# Altium PCB PCB1.PcbDoc
Units mm, origin at the board's own origin, x right, y up, seen from the top; angles counter-clockwise.
Board outline 16 x 35 mm, 2 copper layers (Top Layer, Bottom Layer); 36 components, 31 nets, 126 pads, 45 vias.
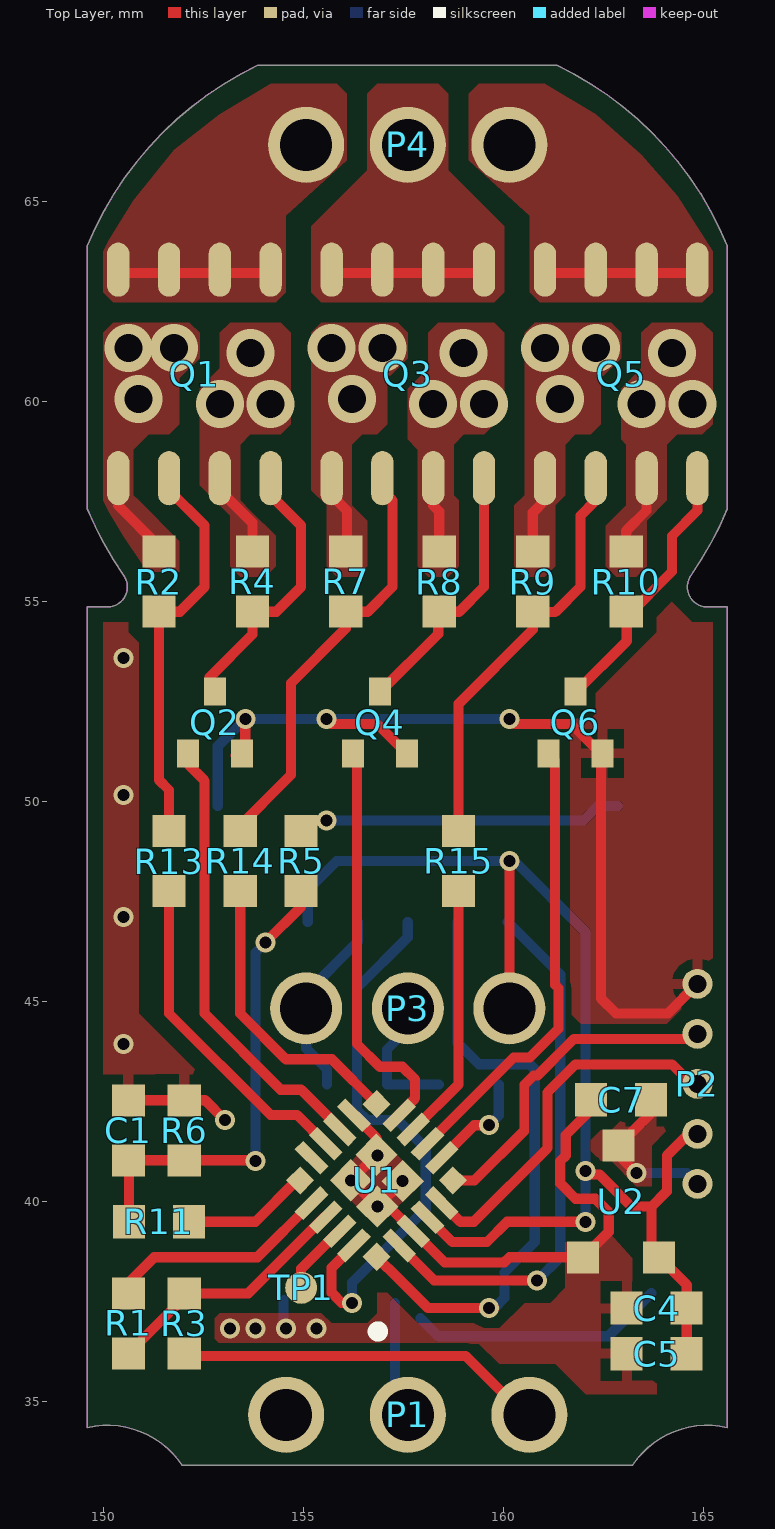
[diagram p0: Top Layer view]
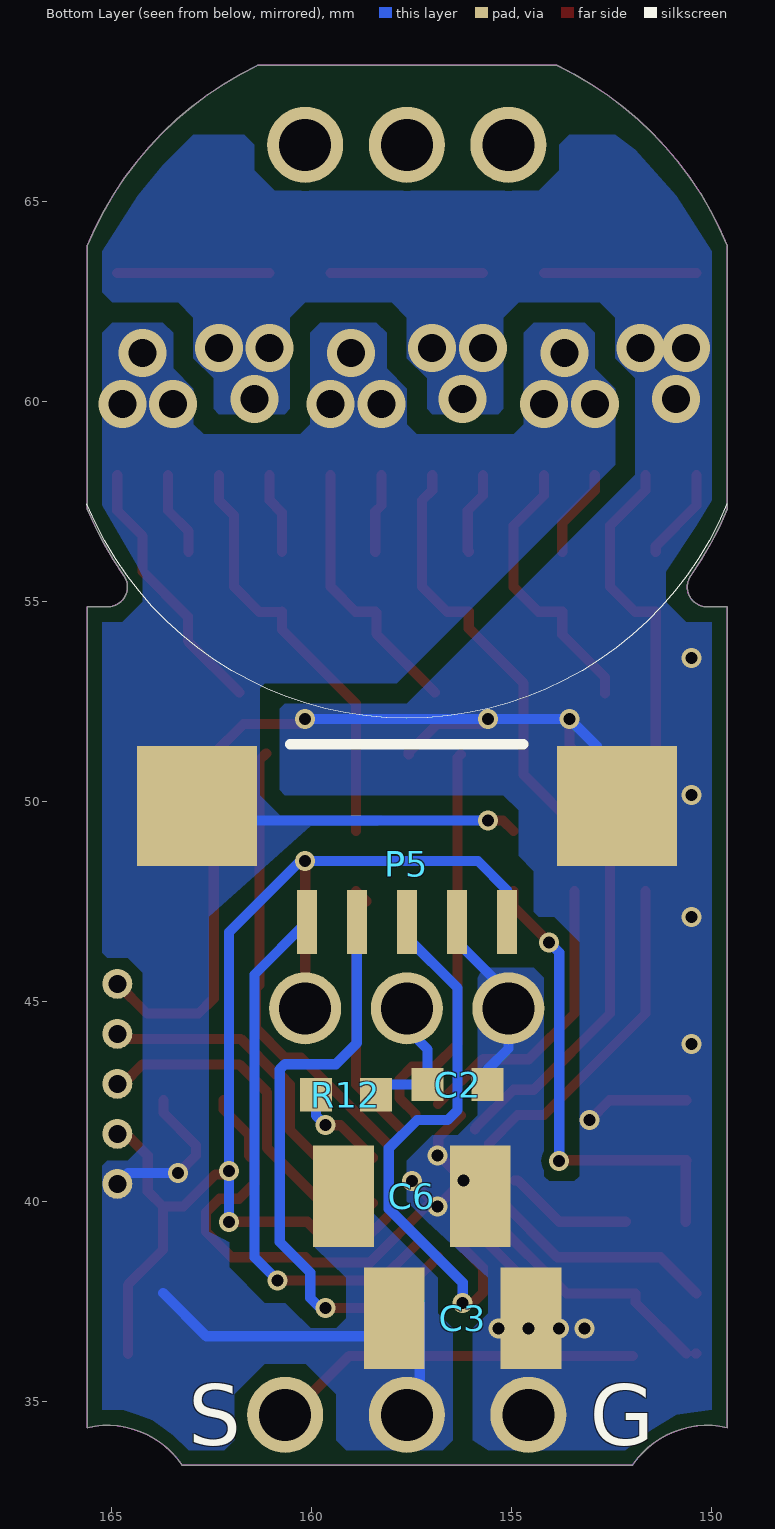
[diagram p1: Bottom Layer view, seen from below]

## Layer stack, top to bottom
Top Solder: solder mask 0.0102, Solder Resist, Dk 3.5
Top Layer: signal copper 0.0356
Dielectric 1: dielectric 0.32, FR-4, Dk 4.8
Bottom Layer: signal copper 0.0356
Bottom Solder: solder mask 0.0102, Solder Resist, Dk 3.5

## Board outline
149.595,34.352 cw(c150.095,32.158) 151.965,33.408 163.224,33.408 cw(c165.095,32.158) 165.595,34.352 165.595,54.866 165.095,54.866 cw(c165.095,55.366) 164.685,55.653 ccw(c157.595,60.608) 165.595,57.318 165.595,63.898 ccw(c157.595,60.608) 161.334,68.408 153.855,68.408 ccw(c157.595,60.608) 149.595,63.898 149.595,57.318 ccw(c157.595,60.608) 150.504,55.653 cw(c150.095,55.366) 150.095,54.866 149.595,54.866

## Design rules (kind name [scope] priority, off if disabled: settings)
Clearance [All] p1: gap=0.2
ComponentClearance [All] p1: gap=0 collisioncheckmode=3 verticalgap=0 showdistances=TRUE
PolygonConnect PolygonConnect_2 [HasFootprint('ZHB_DTC114WUA')] p1: connectstyle=Relief reliefconductorwidth=0.254 reliefentries=4 polygonreliefangle="90 Angle" airgapwidth=0.254
PolygonConnect PolygonConnect_1 [HasFootprint('ZHB_0603') And OnLayer('Top Layer')] p2: connectstyle=Relief reliefconductorwidth=0.254 reliefentries=4 polygonreliefangle="90 Angle" airgapwidth=0.254
PolygonConnect [All] p3: connectstyle=Direct reliefconductorwidth=0.254 reliefentries=4 polygonreliefangle="90 Angle" airgapwidth=0.254
RoutingVias [All] p1: holewidth=0.5 width=0.9 viastyle="Through Hole" minholewidth=0.3 minwidth=0.5 maxholewidth=0.5 maxwidth=0.9
SolderMaskExpansion [All] p1: expansion=0.102
Width [All] p1: maxlimit=0.254 minlimit=0.254 preferedwidth=0.254
29 further rules are at their usual default settings.

## Classes and differential pairs
component class BLDC_SERVO: C1 C2 C3 C4 C5 P1 P2 P3 P4 P5 Q1 Q2 Q3 Q4 Q5 Q6 R1 R2 R3 R4 R5 R6 R7 R8 R9 R10 TP1 U1 U2

## Components (designator, comment, footprint, x,y, rotation, side; value= is the part's Value field where it differs from the comment)
C1 "100nF" ZHB_0603 150.622,41.783 r270 top
C2 "100nF" ZHB_0603 156.337,42.926 r0 bottom
C3 "47uF/1210" ZHB_1210 156.21,37.084 r0 bottom
C4 "100nF" ZHB_0603 163.83,37.338 r0 top
C5 "10uF/0805" ZHB_0603 163.83,36.195 r0 top
C6 "47uF/1210" ZHB_1210 157.48,40.132 r0 bottom (schematic designator C3)
C7 "100nF" ZHB_0603 162.941,42.545 r180 top (schematic designator C4)
P1 "SERVO_LINE" Power_com 160.647,34.671 r180 top
P2 "PROG" PRO_5 164.846,40.446 r90 top
P3 "POT" 'CON_3 160.147,44.831 r180 top
P4 "MOTOR" Motor_Con3 155.067,66.421 r0 top locked
P5 "HALL" 125T 160.107,46.99 r180 bottom
Q1 "NCE4606" NCE4606 150.368,58.166 r90 top locked
Q2 "DTC114WUA/SOT323" ZHB_DTC114WUA 152.781,51.181 r0 top
Q3 "NCE4606" NCE4606 155.702,58.166 r90 top locked
Q4 "DTC114WUA/SOT323" ZHB_DTC114WUA 156.909,51.181 r0 top
Q5 "NCE4606" NCE4606 161.036,58.166 r90 top locked
Q6 "DTC114WUA/SOT323" ZHB_DTC114WUA 161.798,51.181 r0 top
R1 "3K3" ZHB_0603 150.622,36.957 r90 top
R2 "3K3" ZHB_0603 151.384,55.499 r270 top
R3 "3K3" ZHB_0603 152.019,36.957 r90 top
R4 "3K3" ZHB_0603 153.721,55.499 r270 top
R5 "10K" ZHB_0603 154.94,48.514 r270 top
R6 "3K3" ZHB_0603 152.019,41.783 r90 top
R7 "3K3" ZHB_0603 156.058,55.499 r270 top
R8 "3K3" ZHB_0603 158.394,55.499 r270 top
R9 "3K3" ZHB_0603 160.731,55.499 r270 top
R10 "3K3" ZHB_0603 163.068,55.499 r270 top
R11 "100" ZHB_0603 151.384,39.497 r180 top (schematic designator R6)
R12 "100" ZHB_0603 159.131,42.672 r180 bottom (schematic designator R6)
R13 "100" ZHB_0603 151.638,48.514 r270 top (schematic designator R6)
R14 "100" ZHB_0603 153.416,48.514 r270 top (schematic designator R6)
R15 "100" ZHB_0603 158.877,48.514 r270 top (schematic designator R6)
TP1 "PAD" Check_point 154.94,37.846 r90 top
U1 "EFM8BB10F8G" EFM8B10F8G 156.826,40.531 r135 top
U2 "ME6209A33/SOT23" ZHB_ME6208 162.941,38.608 r0 top

## Footprints (in the part's own frame and the unit in brackets; to place one, negate y for a bottom-side part, rotate by r counter-clockwise, add the part's x,y. Pads: shape width x height; smd on the part's side, far side on the other; paste and mask are expansions set on the pad)
125T [mm]
  rect 3x3 smd: 0(-2.75,2.9) 0(7.75,2.9)
  rect 0.5x1.6 smd: 1(0,0) 2(1.25,0) 3(2.5,0) 4(3.75,0) 5(5,0)
'CON_3 [mm]
  round 1.8 hole 1.3: 1(0,0) 2(2.54,0) 3(5.08,0)
Check_point [mm]
  round 0.8 smd: 0(0,0)
EFM8B10F8G [mm]
  rect 0.75x0.75 smd: 0(-0.475,-0.45) 0(-0.475,0.45) 0(0.455,0.45) 0(0.455,-0.45)
  rect 0.5x0.5 smd: 1(-1.35,1.35) 6(-1.35,-1.35) 11(1.35,-1.35) 16(1.35,1.35)
  rect 0.9x0.3 smd: 2(-1.55,0.75) 3(-1.55,0.25) 4(-1.55,-0.25) 5(-1.55,-0.75) 12(1.55,-0.75) 13(1.55,-0.25) 14(1.55,0.25) 15(1.55,0.75)
  rect 0.3x0.9 smd: 7(-0.75,-1.55) 8(-0.25,-1.55) 9(0.25,-1.55) 10(0.75,-1.55) 17(0.75,1.55) 18(0.25,1.55) 19(-0.25,1.55) 20(-0.75,1.55)
  silkscreen extent -2.82,2.52 -2.57,2.77
Motor_Con3 [mm]
  round 1.9 hole 1.3: 1(0,0) 2(2.54,0) 3(5.08,0)
NCE4606 [mm]
  oval 1.354x0.559 smd: 1(-0.08,0) 2(-0.08,-1.27) 3(-0.08,-2.54) 4(-0.08,-3.81) 5(5.134,-3.81) 6(5.134,-2.54) 7(5.134,-1.27) 8(5.134,0)
Power_com [mm]
  round 1.9 hole 1.3: 1(0,0) 2(3.04,0) 3(6.08,0)
PRO_5 [mm]
  round 0.75 hole 0.45: 1(0,0) 2(1.25,0) 3(2.5,0) 4(3.75,0) 5(5,0)
ZHB_0603 [mm]
  rect 0.8x0.83 smd: 1(-0.75,0) 2(0.75,0)
ZHB_1210 [mm]
  rect 1.52x2.54 smd: 1(-1.71,0) 2(1.71,0)
ZHB_DTC114WUA [mm]
  rect 0.55x0.7 smd: 1(-0.675,0.025) 2(0.675,0.025) 3(0,1.575)
ZHB_ME6208 [mm]
  rect 0.8x0.8 smd: 1(-0.95,0) 2(0.95,0) 3(-0.061,2.8)

## Part data
C1 C2 C3 C4 C5 C6 C7: library part CAP(SMD)
P1 P3 P4: library part HEAD_3X1_V
P2 P5: library part HEAD_5X1_V
Q1 Q3 Q5: library part FDS8858DS
Q2 Q4 Q6: library part DTC114WUA
R1 R2 R3 R4 R5 R6 R7 R8 R9 R10 R11 R12 R13 R14 R15: library part RES(SMD)
TP1: library part TP
U2: library part ME6209A33

## Via types
v1: diameter 0.5, hole 0.3, Top Layer to Bottom Layer, tented both sides, 27 vias
v2: diameter 1.2, hole 0.7, Top Layer to Bottom Layer, tented both sides, 18 vias

## Nets (pads, with @x,y where several pads share a name; then routed paths per layer and width w, separated by ;. In a path a pad name is that pad's centre, name@x,y a point inside that pad or via, vN(x,y) a via of type N, cw(c..) or ccw(c..) an arc to the next point about the centre after c; other vN are vias at no path point)
+3V3: C4.2 C5.2 P2.2 P3.1 P5.5 U1.4 U2.2 | length 32.6
  Top Layer w0.254: U1.4 158.721,38.989 159.586,38.989 160.094,39.497 v1(162.052,39.497) ; P3.1 v1(160.147,48.514) ; v1(162.052,40.767) 162.138,40.681 162.392,40.681 163.195,39.878 163.703,39.878 ; C5.2 C4.2 164.58,37.919 U2.2 163.703,38.796 163.703,39.878 ; P2.2 164.632,41.696 164.084,41.148 164.084,40.259 163.703,39.878
  Bottom Layer w0.254: P5.5 155.107,47.792 155.829,48.514 v1(160.147,48.514) 160.274,48.514 162.052,46.736 v1(162.052,40.767) v1(162.052,39.497)
+VBAT: C3.2 C6.2 C7.1 P1.2 P2.1 P5.0@162.857,49.89 Q1.3 Q3.3 Q5.3 R4.1 R5.1 R8.1 R10.1 U2.3 | length 28
  Top Layer w0.254: Q1.3@152.908,58.166 Q1.3 152.908,57.785 153.721,56.972 R4.1 ; R5.1 155.206,49.53 v1(155.575,49.53) ; Q3.3@158.242,58.166 Q3.3 158.242,57.404 158.394,57.252 R8.1 ; R10.1 163.068,56.769 163.576,57.277 Q5.3 Q5.3@163.576,58.166 ; v1(163.322,40.712) 162.88,41.154 U2.3 163.691,42.219 C7.1
  Bottom Layer w0.254: v1(155.575,49.53) 161.997,49.53 162.357,49.89 P5.0@162.857,49.89 ; C3.2@157.285,37.465 157.285,34.866 P1.2@157.607,34.544 ; C3.2 158.369,36.635 162.619,36.635 163.703,37.719 ; v1(163.322,40.712) 164.58,40.712 P2.1
  other v2: 152.908,59.944 154.178,59.944 158.242,59.944 159.512,59.944 163.449,59.944 164.719,59.944 153.67,61.214 159.004,61.214 164.211,61.214
AH: Q2.1 U1.13 | length 11.3
  Top Layer w0.254: Q2.1 152.106,50.941 152.527,50.52 152.527,44.704 154.432,42.799 154.94,42.799 155.907,41.832 U1.13
AL: Q1.2 R2.2 R13.1 | length 10.2
  Top Layer w0.254: R13.1 151.638,50.292 151.384,50.546 R2.2 151.904,54.749 152.527,55.372 152.527,56.896 151.638,57.785 Q1.2 Q1.2@151.638,58.166
BH: Q4.1 U1.10 | length 10.2
  Top Layer w0.254: Q4.1@156.259,51.181 156.337,51.103 156.337,43.942 156.909,43.37 157.472,43.37 157.789,43.053 157.789,42.587 157.392,42.19 U1.10
BL: Q3.2 R7.2 R14.1 | length 11
  Top Layer w0.254: R14.1@153.289,49.276 154.686,50.673 154.686,52.959 156.058,54.331 R7.2 156.579,54.749 156.591,54.737 157.226,55.372 157.226,57.531 156.972,57.785 Q3.2 Q3.2@156.972,58.166
CH: Q6.1 U1.8 | length 11.5
  Top Layer w0.254: U1.8 160.253,43.604 160.655,43.604 161.374,44.323 161.374,45.339 161.29,45.423 161.29,51.039 Q6.1
CL: Q5.2 R9.2 R15.1 | length 10.7
  Top Layer w0.254: R15.1 158.877,52.451 160.731,54.305 R9.2 160.743,54.737 161.29,54.737 161.925,55.372 161.925,57.15 162.306,57.531 Q5.2 Q5.2@162.306,58.166
GND: C1.1 C2.1 C3.1 C4.1 C5.1 C6.1 C7.2 P1.3 P2.5 P3.3 P5.0@152.357,49.89 P5.4 Q1.1 Q2.2 Q3.1 Q4.2 Q5.1 Q6.2 R2.1 R6.2 R7.1 R9.1 U1.0 U1.3 U1.12 U2.1 | length 53.5
  Top Layer w0.254: Q1.1@150.368,58.166 Q1.1 150.368,57.404 151.384,56.388 R2.1 ; C1.1 R6.2 152.539,42.533 v1(153.035,42.037) ; Q2.2@153.304,51.155 153.543,51.394 v1(153.543,52.07) ; v1(155.575,52.07) 155.702,51.943 156.845,51.943 157.559,51.229 Q4.2@157.559,51.181 ; Q3.1@155.702,58.166 Q3.1 155.702,57.658 156.083,57.277 156.083,56.274 R7.1 ; U1.12 156.822,41.595 156.822,41.171 v1(156.186,40.534) U1.0@156.844,39.877 ; v1(157.48,40.513) U1.0@156.844,39.877 ; v1(160.147,52.07) 160.274,51.943 161.686,51.943 Q6.2@162.448,51.181 ; R9.1 160.731,57.226 161.036,57.531 Q5.1 Q5.1@161.036,58.166 ; C7.2 162.191,42.303 161.553,41.665 161.553,41.15 161.417,41.014 161.417,40.458 161.807,40.068 161.813,40.074 162.291,40.074 162.629,39.736 162.629,39.258 162.623,39.252 162.629,39.246 U2.1 160.147,38.608 160.02,38.481 158.522,38.481 157.126,39.877 U1.0@156.844,39.877 ; Q6.2@162.433,51.181 162.433,45.085 162.814,44.704 164.104,44.704 P2.5
  Bottom Layer w0.254: P5.0@152.857,49.89 152.857,51.384 v1(153.543,52.07) v1(155.575,52.07) v1(160.147,52.07) ; C3.1 C3.1@154.5,37.533 ; C2.1 155.587,43.307 155.067,43.827 P3.3 155.067,45.212 156.357,46.502 P5.4
  other v1: 153.162,36.83 153.797,36.83 154.559,36.83 155.321,36.83 156.845,39.878 156.845,41.148 150.495,43.942 150.495,47.117 150.495,50.165 150.495,53.594
  other v2: 150.876,60.071 156.21,60.071 161.417,60.071 150.622,61.341 151.765,61.341 155.702,61.341 156.972,61.341 161.036,61.341 162.306,61.341
HA: P5.1 U1.2 | length 13.6
  Top Layer w0.254: U1.2 158.269,38.027 v1(160.836,38.027)
  Bottom Layer w0.254: P5.1 161.417,45.68 161.417,38.608 v1(160.836,38.027)
HB: P5.2 U1.1 | length 15.2
  Top Layer w0.254: U1.1 157.109,38.339 157.114,38.339 158.115,37.338 v1(159.639,37.338) v1@159.766,37.338
  Bottom Layer w0.254: P5.2 158.857,43.962 159.385,43.434 160.655,43.434 160.782,43.307 160.782,38.989 160.02,38.227 160.02,37.592 159.766,37.338 v1(159.639,37.338)
HC: P5.3 U1.20 | length 14
  Top Layer w0.254: v1(156.21,37.465) 155.956,37.465 155.702,37.719 155.702,38.346 U1.20
  Bottom Layer w0.254: v1(156.21,37.465) 156.21,37.973 158.057,39.82 158.057,41.333 157.353,42.037 156.591,42.037 156.337,42.291 156.337,45.339 157.607,46.609 P5.3
NetP1_1: P1.1 R3.1 | length 9.4
  Top Layer w0.254: R3.1@151.956,36.144 159.048,36.144 P1.1@160.647,34.544
NetP2_3: P2.3 U1.5 | length 9.2
  Top Layer w0.254: U1.5 158.92,39.497 159.258,39.497 161.1,41.338 161.1,42.731 161.8,43.432 164.213,43.432 164.699,42.946 P2.3
NetP2_4: P2.4 U1.6 | length 8.3
  Top Layer w0.254: U1.6 159.276,40.531 160.528,41.783 160.528,42.928 160.75,43.15 160.843,43.15 161.762,44.069 164.719,44.069 P2.4
NetQ1_4: Q1.4 Q2.3 R4.2 | length 7.1
  Top Layer w0.254: Q2.3@152.654,52.705 152.654,53.112 153.721,54.179 R4.2 154.317,54.749 154.94,55.372 154.94,56.896 154.178,57.658 Q1.4 Q1.4@154.178,58.166
NetQ3_4: Q3.4 Q4.3 R8.2 | length 6.8
  Top Layer w0.254: Q4.3@156.909,52.731 158.369,54.191 158.369,54.724 R8.2 158.889,54.749 159.512,55.372 Q3.4 Q3.4@159.512,58.166
NetQ5_4: Q5.4 Q6.3 R10.2 | length 6.7
  Top Layer w0.254: Q6.3@161.798,52.731 163.08,54.013 163.08,54.622 164.211,55.753 164.211,56.642 164.846,57.277 Q5.4 Q5.4@164.846,58.166
NetR1_1: R1.1 R3.2 U1.18 | length 6.5
  Top Layer w0.254: R1.1@150.368,36.207 R1.1@150.392,36.207 ; R1.1 151.892,37.477 151.892,37.707 R3.2 153.616,37.707 155.521,39.611 U1.18
NetR1_2: R1.2 U1.17 | length 5.8
  Top Layer w0.254: R1.2@150.368,37.707 151.269,38.608 153.843,38.608 U1.17
NetR1_3: C1.2 R5.2 R6.1 R11.2 | length 11.9
  Top Layer w0.254: R11.2 150.634,41.021 C1.2 R6.1 153.785,41.033 v1(153.797,41.021) ; v1(154.051,46.482) 154.94,47.371 R5.2
  Bottom Layer w0.254: v1(153.797,41.021) 153.797,46.228 v1(154.051,46.482)
NetR1_4: C2.2 P3.2 R12.2 | length 3.4
  Bottom Layer w0.254: P3.2 157.607,44.323 157.087,43.803 C2.2 R12.2@158.381,42.926
NetR1_5: R13.2 U1.14 | length 8.3
  Top Layer w0.254: R13.2 151.638,44.704 154.178,42.164 154.839,42.164 U1.14
NetR1_6: R14.2 U1.11 | length 7.4
  Top Layer w0.254: R14.2 153.416,44.704 154.559,43.561 155.705,43.561 U1.11
NetR1_7: R15.2 U1.9 | length 6.8
  Top Layer w0.254: U1.9 158.877,42.935 R15.2 R15.2@158.623,47.51
NetTP1_1: TP1.0 U1.19 | length 1.9
  Top Layer w0.254: TP1.0 154.94,38.324 155.842,39.225 155.907,39.225 U1.19
PH_A: P4.1 Q1.5 Q1.6 Q1.7 Q1.8 | length 3.8
  Top Layer w0.254: Q1.8@150.368,63.22 Q1.5@154.178,63.22
PH_B: P4.2 Q3.5 Q3.6 Q3.7 Q3.8 | length 3.8
  Top Layer w0.254: Q3.8@155.702,63.22 Q3.5@159.512,63.22
PH_C: P4.3 Q5.5 Q5.6 Q5.7 Q5.8 | length 3.8
  Top Layer w0.254: Q5.8@161.036,63.22 Q5.5@164.846,63.22
VBAT: R11.1 U1.16 | length 3.2
  Top Layer w0.254: R11.1 153.797,39.497 154.831,40.531 U1.16
VPOT: R12.1 U1.7 | length 2.6
  Top Layer w0.254: U1.7 159.266,41.91 v1(159.639,41.91)
  Bottom Layer w0.254: v1(159.639,41.91) 159.881,42.152 R12.1 R12.1@159.881,42.926
pads on no net: U1.15

## Polygon pours and split planes (outlines as drawn)
GND on Top Layer "GND" (solid, pour order 38): 152.908,37.211 152.781,37.084 152.781,36.576 152.908,36.449 159.385,36.449 159.766,36.068 159.893,35.941 161.29,35.941 162.052,35.179 162.466,35.179 163.83,35.179 163.83,37.846 163.224,37.973 163.224,38.579 162.596,39.279 162.466,39.149 162.306,38.989 161.544,38.989 161.544,38.481 161.544,37.846 161.163,37.465 160.655,37.465 160.528,37.465 159.893,36.83 159.512,36.83 159.258,36.957 157.861,36.957 157.099,37.719 156.845,37.719 156.845,37.211 156.591,36.957 155.575,36.957 155.702,36.957 155.448,37.211 153.162,37.211
+VBAT on Top Layer "+VBAT" (solid, pour order 24): 163.449,61.722 163.449,60.96 163.449,60.833 162.941,60.325 162.941,59.182 162.941,59.055 163.068,58.928 163.068,57.531 163.068,57.404 162.56,56.896 162.56,55.88 162.814,55.626 163.322,55.626 163.576,55.88 163.576,56.896 163.576,57.023 164.084,57.531 164.084,58.928 164.338,59.182 164.973,59.182 165.227,59.436 165.227,61.722 164.973,61.976 163.703,61.976
+VBAT on Top Layer "+VBAT" (solid, pour order 22): 158.115,61.722 158.115,61.087 158.115,60.96 158.115,60.833 157.607,60.325 157.607,59.436 157.607,59.182 157.607,59.055 157.861,58.801 157.861,55.88 158.115,55.626 158.623,55.626 158.75,55.753 158.877,55.88 158.877,57.531 158.75,57.658 158.75,58.928 159.004,59.182 159.512,59.182 159.893,59.563 160.02,59.69 160.02,61.722 159.766,61.976 158.369,61.976
GND on Top Layer "GND" (solid, pour order 20): 160.782,61.976 160.528,61.722 160.528,57.658 160.274,57.404 160.274,55.88 160.528,55.626 161.036,55.626 161.29,55.88 161.29,57.404 161.544,57.658 161.544,58.928 161.798,59.182 162.052,59.182 162.179,59.182 162.433,59.436 162.433,60.579 162.941,61.087 162.941,61.722 162.687,61.976
GND on Top Layer "GND" (solid, pour order 18): 155.448,61.976 155.194,61.722 155.194,57.785 155.575,57.404 155.575,55.88 155.829,55.626 156.337,55.626 156.591,55.88 156.591,56.642 156.591,57.023 156.21,57.404 156.21,57.531 156.21,58.928 156.337,59.055 156.464,59.182 156.845,59.182 156.972,59.309 157.099,59.436 157.099,60.579 157.226,60.706 157.607,61.087 157.607,61.722 157.353,61.976
+VBAT on Top Layer "+VBAT" (solid, pour order 16): 153.162,61.976 152.908,61.722 152.908,60.96 152.908,60.833 152.4,60.325 152.4,57.912 152.527,57.785 152.654,57.658 153.162,57.15 153.162,55.88 153.416,55.626 154.051,55.626 154.305,55.88 154.305,56.642 153.67,57.277 153.416,57.531 153.416,58.928 153.67,59.182 154.432,59.182 154.686,59.436 154.686,61.722 154.432,61.976
GND on Top Layer "GND" (solid, pour order 14): 150.241,61.976 149.987,61.722 149.987,57.531 150.114,57.277 150.495,56.642 151.003,55.88 151.13,55.753 151.892,55.753 151.892,56.515 150.876,57.531 150.749,57.658 150.749,58.801 151.13,59.182 151.638,59.182 151.892,59.436 151.892,60.579 152.4,61.087 152.4,61.722 152.146,61.976
PH_C on Top Layer "PHC" (solid, pour order 10): 159.385,67.945 159.131,67.691 159.131,66.04 160.655,64.643 160.655,62.738 160.909,62.484 165.1,62.484 164.973,62.484 165.227,62.738 165.227,63.754 164.338,65.151 163.449,66.167 162.306,67.183 161.036,67.945
PH_B on Top Layer "PHB" (solid, pour order 8): 156.845,67.945 156.591,67.691 156.591,65.786 155.194,64.389 155.194,62.738 155.448,62.484 159.766,62.484 160.02,62.738 160.02,64.389 158.623,65.786 158.623,67.691 158.369,67.945
PH_A on Top Layer "PHA" (solid, pour order 6): 154.305,62.484 150.241,62.484 149.987,62.738 149.987,63.754 150.114,64.008 150.749,65.024 151.765,66.294 152.908,67.183 154.178,67.945 154.305,67.945 155.829,67.945 156.083,67.691 156.083,66.04 154.559,64.643 154.559,64.516 154.559,62.738
GND on Top Layer "GND" (solid, pour order 40): 156.845,39.37 157.988,40.513 156.972,41.529 156.906,41.595 156.822,41.595 156.784,41.595 155.702,40.513
GND on Top Layer "GND" (solid, pour order 42): 164.211,54.991 163.83,54.61 163.83,54.229 162.306,52.705 162.306,52.197 162.179,52.07 162.052,52.07 161.422,52.07 161.686,51.943 161.671,51.928 161.671,51.562 161.671,44.704 161.925,44.45 164.084,44.45 164.338,44.704 164.465,44.831 165.1,44.831 165.227,44.958 165.227,54.483 164.719,54.483
GND on Top Layer "GND" (solid, pour order 44): 149.987,54.483 149.987,41.783 152.146,41.783 153.416,41.783 153.416,42.037 153.416,42.164 150.876,44.704 150.876,53.975 150.749,54.102 150.622,54.229 150.622,54.483 150.495,54.483
+VBAT on Top Layer "+VBAT" (solid, pour order 46): 163.195,42.926 163.195,42.291 163.068,42.164 162.687,41.783 162.433,41.783 162.179,41.529 162.179,41.275 162.433,41.021 162.687,41.021 163.322,40.386 163.449,40.386 163.703,40.386 163.703,41.402 164.338,42.037 164.338,42.672 164.084,42.926
GND on Bottom Layer "GND" (solid, pour order 36): 155.956,34.036 155.575,33.782 152.146,33.782 151.511,34.29 150.876,34.671 149.987,34.798 149.987,54.483 154.94,54.483 155.575,54.483 157.607,52.451 157.861,52.451 160.655,52.451 160.782,52.324 160.782,50.292 160.655,50.165 155.321,50.165 155.194,50.165 154.813,49.784 154.813,49.53 154.813,48.641 154.432,48.26 154.432,47.244 154.305,47.117 153.924,47.117 153.289,46.482 153.289,40.64 153.416,40.513 154.051,40.513 154.178,40.64 154.178,40.894 154.178,45.593 154.432,45.847 155.702,45.847 155.829,45.593 155.829,42.164 156.337,41.656 156.972,41.656 157.607,41.021 157.607,40.005 157.099,39.497 155.575,38.1 155.575,37.211 155.956,36.83
+VBAT on Bottom Layer "+VBAT" (solid, pour order 34): 156.455,34.671 156.455,34.036 156.709,33.782 159.122,33.782 159.376,34.036 159.376,35.179 160.138,35.941 161.154,35.941 161.916,35.179 161.916,34.036 162.17,33.782 163.059,33.782 163.44,34.163 163.816,34.434 163.955,34.534 164.329,34.671 164.71,34.798 165.218,34.798 165.218,39.624 165.218,40.894 165.091,41.021 164.583,41.021 164.329,41.275 164.207,41.398 164.207,43.688 164.207,45.724 164.583,46.101 165.091,46.101 165.218,46.228 165.218,54.102 165.218,54.483 163.059,54.483 161.281,52.959 161.281,50.165 160.769,49.653 160.024,49.653 158.242,49.653 158.242,49.403 160.011,49.403 162.56,47.117 162.56,40.522 162.56,39.243 162.043,38.989 162.043,38.354 161.408,37.719 161.154,37.465 161.281,37.465 160.646,37.465 160.519,37.338 160.011,36.83 159.376,36.83 159.122,37.084 159.122,38.1 159.893,38.853 159.893,39.757 158.493,39.757 156.836,38.1 156.836,37.211 156.455,36.83
GND on Bottom Layer "GND" (solid, pour order 32): 162.941,66.675 163.703,65.913 164.338,65.151 165.227,63.754 165.227,62.738 164.973,62.484 163.322,62.484 163.195,62.357 162.941,62.103 162.941,61.087 162.433,60.579 162.433,59.817 162.306,59.69 160.655,59.69 160.528,59.817 160.528,62.103 160.147,62.484 158.369,62.484 158.242,62.484 157.988,62.484 157.607,62.103 157.607,61.087 157.099,60.579 157.099,59.817 156.972,59.69 155.321,59.69 155.194,59.817 155.194,62.103 154.813,62.484 152.781,62.484 152.4,62.103 152.4,61.087 151.892,60.579 151.892,59.436 151.892,58.166 155.829,54.229 152.654,54.292 152.908,54.229 150.495,54.356 151.13,54.991 151.13,55.753 150.368,56.896 149.987,57.531 149.987,63.754 150.876,65.151 151.892,66.294 152.4,66.675 153.543,66.675 153.797,66.421 153.797,65.786 154.309,65.274 160.905,65.274 161.417,65.786 161.417,66.421 161.671,66.675
+VBAT on Bottom Layer "+VBAT" (solid, pour order 30): 164.973,61.976 165.227,61.722 165.227,57.404 164.338,55.88 164.211,55.626 164.211,55.499 164.211,54.991 164.592,54.61 164.719,54.483 164.846,54.356 165.1,54.356 165.1,53.213 164.846,52.959 161.29,52.832 161.163,52.959 157.861,52.959 152.4,58.42 152.4,58.547 152.4,59.309 152.4,60.325 152.908,60.833 152.908,61.722 153.162,61.976 154.432,61.976 154.686,61.722 154.686,59.436 154.94,59.182 155.067,59.182 157.353,59.182 157.607,59.436 157.607,60.325 158.115,60.833 158.115,61.722 158.369,61.976 159.766,61.976 160.02,61.722 160.02,59.436 160.274,59.182 162.687,59.182 162.941,59.436 162.941,60.325 163.449,60.833 163.449,61.722 163.703,61.976 164.973,61.976 165.227,61.722

## Keep-outs
Keep-Out Layer:
  lines w0.013: 149.595,34.352 cw(c150.095,32.158) 151.965,33.408 163.224,33.408 cw(c165.095,32.158) 165.595,34.352 165.595,54.866 165.095,54.866 cw(c165.095,55.366) 164.685,55.653 ccw(c157.595,60.608) 165.595,57.318 165.595,63.898 ccw(c157.595,60.608) 161.334,68.408 153.855,68.408 ccw(c157.595,60.608) 149.595,63.898 149.595,57.318 ccw(c157.595,60.608) 150.504,55.653 cw(c150.095,55.366) 150.095,54.866 149.595,54.866 149.595,53.908 149.595,34.352

## Silkscreen, mask and mechanical layers (free items; w line width, h text height)
Bottom Overlay:
  lines w0.013: 149.605,57.445 ccw(c157.605,60.735) 165.605,57.445
  lines w0.254: 154.686,51.435 160.528,51.435
  text "G" at 153.035,33.909 h1.52
  text "S" at 163.068,33.909 h1.52